# EAGLE board PCB (EAGLE 9.7.0)
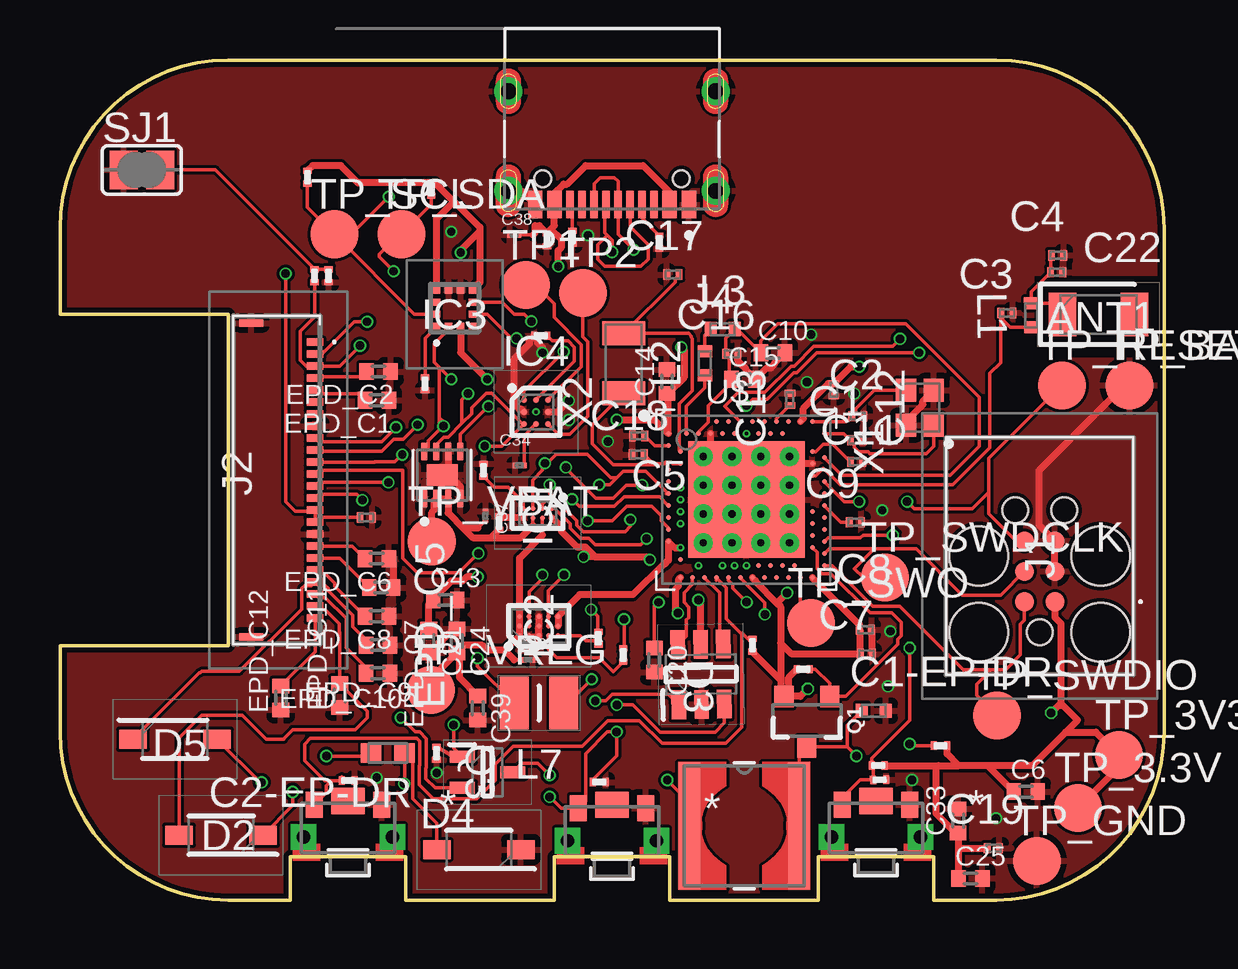
[diagram p0: board, top side]
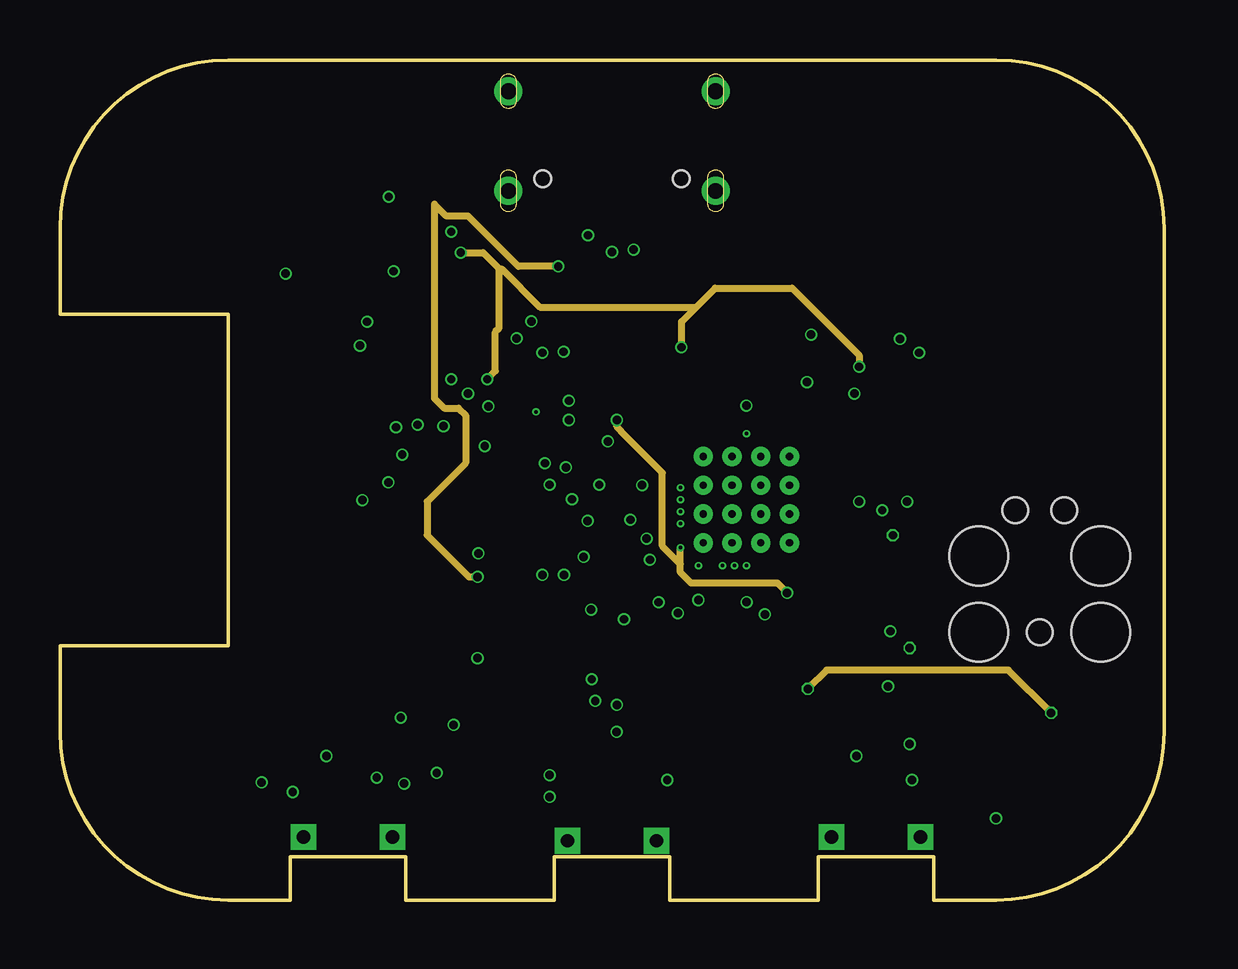
[diagram p1: board, inner layer Route15]
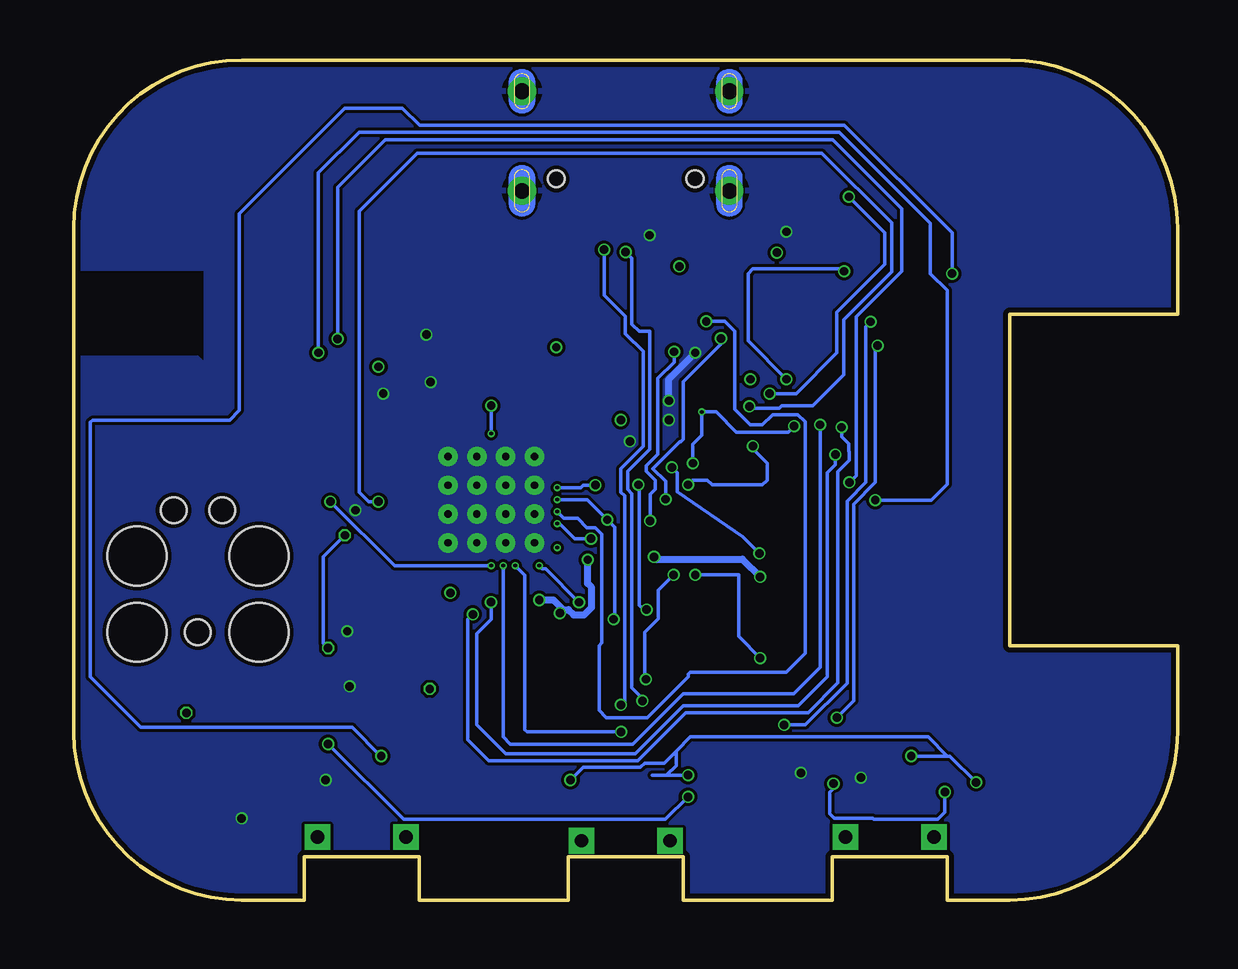
[diagram p2: board, bottom side, seen from below]

Size 46 x 35 mm. Coordinates in mm from the lower left corner, seen from the top.
Outline: 46,7 46,28 arc90 39,35 7,35 arc90 0,28 0,24.4 7,24.4 7,10.6 0,10.6 0,7 arc90 7,0 9.6,0 9.6,1.8 14.4,1.8 14.4,0 20.6,0 20.6,1.8 25.4,1.8 25.4,0 31.6,0 31.6,1.8 36.4,1.8 36.4,0 39,0 arc90 46,7
Copper layers (1+2*15+16): Top 0.035mm / dielectric 1.6mm / Route2 0.035mm / dielectric 0.15mm / Route15 0.035mm / dielectric 0.2mm / Bottom 0.035mm
Design rules "jlcpcb-2layers.dru *": minimum track width 5mil, minimum drill 0.3mm, track to track 5mil, track to pad 5mil, pad to pad 5mil, via to via 5mil, smd to smd 5mil, copper to edge 0.2mm, drill to drill 6mil, minimum pad ring 10mil, minimum via ring 3mil, stop-mask expansion 4mil, vias tented up to drill 0mil, thermal gap 10mil

## Footprints (pad centres in the part's own frame; a part is rotated, then mirrored left to right if it is on the bottom)
2450AT18B100E_ANTC3216X140N = smd 1.15 x 1.8: 1 -1.5,0; 2 1.5,0
NORDIC_NRF_3_RESC0201_L = smd 0.28 x 0.43: 1 -0.255,0; 2 0.255,0
NORDIC_NRF_3_RESC0402_L = smd 0.5 x 0.6: 1 -0.5,0; 2 0.5,0
NORDIC_NRF_3_RESC0603_L = smd 0.85 x 0.8: 1 -0.7,0; 2 0.7,0
PERFECT_0402_0402 = smd 0.6 x 0.7: 1 -0.5,0; 2 0.5,0
GRM011R60J152KE01L_2_CAPC0201X13N = smd 0.22 x 0.23: 1 -0.185,0; 2 0.185,0
GRM011R60J152KE01L_1_0201 = smd 0.35 x 0.25: 1 0,0.275; 2 0,-0.275
ESP32_C6_LIBRARY_5_SOD3716X135N = smd 1.15 x 0.8: 1 -1.75,0; 2 1.75,0
ESP32_C6_LIBRARY_3_SOT95P280X145-6N = smd 1.2 x 0.6: 1 -1.25,0.95; 2 -1.25,0; 3 -1.25,-0.95; 4 1.25,-0.95; 5 1.25,0; 6 1.25,0.95
BQ25180YBGR_BGA8C40P2X4_100X155X50 = smd 0.2 x 0.2: A1 -0.2,0.6; A2 0.2,0.6; B1 -0.2,0.2; B2 0.2,0.2; C1 -0.2,-0.2; C2 0.2,-0.2; D1 -0.2,-0.6; D2 0.2,-0.6
RT6160AWSC_BGA15C40P3X5_140X230X60 = smd 0.216 x 0.216: A1 -0.4,0.8; A2 0,0.8; A3 0.4,0.8; B1 -0.4,0.4; B2 0,0.4; B3 0.4,0.4; C1 -0.4,0; C2 0,0; C3 0.4,0; D1 -0.4,-0.4; D2 0,-0.4; D3 0.4,-0.4; E1 -0.4,-0.8; E2 0,-0.8; E3 0.4,-0.8
BMA423_BMA423 = smd 0.3 x 0.35: 1 -0.75,-0.775; 2 -0.25,-0.775; 3 0.25,-0.775; 4 0.75,-0.775; 7 0.75,0.775; 8 0.25,0.775; 9 -0.25,0.775; 10 -0.75,0.775 | smd 0.35 x 0.3: 5 0.775,-0.25; 6 0.775,0.25; 11 -0.775,0.25; 12 -0.775,-0.25
DRV2605YZFR_BGA9C50P3X3_144X144X62 = smd 0.25 x 0.25: A1 -0.5,0.5; A2 0,0.5; A3 0.5,0.5; B1 -0.5,0; B2 0,0; B3 0.5,0; C1 -0.5,-0.5; C2 0,-0.5; C3 0.5,-0.5
TC2030-IDC_TC2030IDC = smd 0.783 x 0.783: 1 -0.953,-0.635; 2 -0.953,0.635; 3 0.317,-0.635; 4 0.317,0.635; 5 1.588,-0.635; 6 1.588,0.635 | hole 2.451: -2.223,-2.54; -2.223,2.54; 0.952,-2.54; 0.952,2.54 | hole 1.067: -2.223,0; 2.857,-1.016; 2.857,1.016
503480-2400_5034802400 = smd 0.3 x 0.7: 1 -5.75,1.525; 2 -5.25,1.525; 3 -4.75,1.525; 4 -4.25,1.525; 5 -3.75,1.525; 6 -3.25,1.525; 7 -2.75,1.525; 8 -2.25,1.525; 9 -1.75,1.525; 10 -1.25,1.525; 11 -0.75,1.525; 12 -0.25,1.525; 13 0.25,1.525; 14 0.75,1.525; 15 1.25,1.525; 16 1.75,1.525; 17 2.25,1.525; 18 2.75,1.525; 19 3.25,1.525; 20 3.75,1.525; 21 4.25,1.525; 22 4.75,1.525; 23 5.25,1.525; 24 5.75,1.525 | smd 0.3 x 1: MP1 -6.54,-1.125; MP2 6.54,-1.125
KH-TYPE-C-16P_KINGHELM_KH-TYPE-C-16P = smd 0.6 x 1.15: A1_B12 -3.2,4.725; A4_B9 -2.4,4.725; A9_B4 2.4,4.725; A12_B1 3.2,4.725 | smd 0.3 x 1.15: A5 -1.25,4.725; A6 -0.25,4.725; A7 0.25,4.725; A8 1.25,4.725; B5 1.75,4.725; B6 0.75,4.725; B7 -0.75,4.725; B8 -1.75,4.725 | drill 0.65 pad 1.05: SH1 -4.32,0; SH2 4.32,0; SH3 -4.32,4.15; SH4 4.32,4.15 | hole 0.7: -2.89,3.65; 2.89,3.65
NORDIC_NRF_2_RESC0402_L = smd 0.5 x 0.6: 1 -0.5,0; 2 0.5,0
ESP32_C6_LIBRARY_2_IND_4828-WE-TPC_WRE = smd 0.9 x 5.3: 1 -2.286,0; 2 2.286,0
MLP2016SR47MT0S1_INDC2016X100N = smd 1.2 x 2.2: 1 -1.028,0; 2 1.028,0
ESP32_C6_LIBRARY_4_ESP32_C6_LIBRARY_4_ESP32_C6_LIBRARY_4_ESP32_C6_LIBRARY_4_ESP32_WROVER_SPARKFUN-DISCRETESEMI_SOT23-3 = smd 0.8 x 0.9: 1 -0.95,-1; 2 0.95,-1; 3 0,1.1
ESP32_C6_LIBRARY_6_SOT65P210X110-3N = smd 1.05 x 0.5: 1 -1.05,0.65; 2 -1.05,-0.65; 3 1.05,0
CPF0201D7K68C1_0201 = smd 0.35 x 0.25: 1 0,0.275; 2 0,-0.275
ERA-1AEB3401C_0201 = smd 0.35 x 0.25: 1 0,0.275; 2 0,-0.275
ESP32_C6_LIBRARY_7_JUMPER_SJ = smd 1.168 x 1.6: 1 -0.762,0; 2 0.762,0
2025-10-22_07-23-44_LIBRARY_SW_EVP-AKE31A_PAN = smd 0.711 x 1.092: 1 -1.4,-0.972; 2 1.4,-0.972 | drill 0.559 pad 0.914 square: 3 -1.848,0.381; 4 1.848,0.381 | smd 1.397 x 1.092: 5 0,-1.124
HECTOR_WATCH_1_TP20R = smd 2 x 2: TP 0,0
ESP32_C6_LIBRARY_SON50P200X200X80-9N = smd 0.76 x 0.27: 1 -0.985,0.75; 2 -0.985,0.25; 3 -0.985,-0.25; 4 -0.985,-0.75; 5 0.985,-0.75; 6 0.985,-0.25; 7 0.985,0.25; 8 0.985,0.75 | smd 0.9 x 1.3: 9 0,0
NORDIC_NRF_4_AQFN50P700X700X85_HS-74N = smd 4.85 x 4.85: P$74 0,0 | drill 0.3 pad 0.6: P$75 -1.8,1.8; P$76 -0.6,1.8; P$77 0.6,1.8; P$78 1.8,1.8; P$79 -1.8,0.6; P$80 -0.6,0.6; P$81 0.6,0.6; P$82 1.8,0.6; P$83 -1.8,-0.6; P$84 -0.6,-0.6; P$85 0.6,-0.6; P$86 1.8,-0.6; P$87 -1.8,-1.8; P$88 -0.6,-1.8; P$89 0.6,-1.8; P$90 1.8,-1.8 | smd 0.2 x 0.2: P$A8 -1.25,3.25; P$A10 -0.75,3.25; P$A12 -0.25,3.25; P$A14 0.25,3.25; P$A16 0.75,3.25; P$A18 1.25,3.25; P$A20 1.75,3.25; P$A22 2.25,3.25; P$A23 2.75,3.25; P$AA24 3.25,-2.25; P$AB2 -2.75,-2.5; P$AC5 -2,-2.75; P$AC9 -1,-2.75; P$AC11 -0.5,-2.75; P$AC13 0,-2.75; P$AC15 0.5,-2.75; P$AC17 1,-2.75; P$AC19 1.5,-2.75; P$AC21 2,-2.75; P$AC24 3.25,-2.75; P$AD2 -2.75,-3.25; P$AD4 -2.25,-3.25; P$AD6 -1.75,-3.25; P$AD8 -1.25,-3.25; P$AD10 -0.75,-3.25; P$AD12 -0.25,-3.25; P$AD14 0.25,-3.25; P$AD16 0.75,-3.25; P$AD18 1.25,-3.25; P$AD20 1.75,-3.25; P$AD22 2.25,-3.25; P$AD23 2.75,-3.25; P$B1 -3.25,2.75; P$B3 -2.5,2.75; P$B5 -2,2.75; P$B7 -1.5,2.75; P$B9 -1,2.75; P$B11 -0.5,2.75; P$B13 0,2.75; P$B15 0.5,2.75; P$B17 1,2.75; P$B19 1.5,2.75; P$B24 3.25,2.75; P$C1 -3.25,2.25; P$D2 -2.75,2; P$D23 2.75,2; P$E24 3.25,1.75; P$F2 -2.75,1.5; P$F23 2.75,1.5; P$G1 -3.25,1.25; P$H2 -2.75,1; P$H23 2.75,1; P$J1 -3.25,0.75; P$J24 3.25,0.75; P$K2 -2.75,0.5; P$L1 -3.25,0.25; P$L24 3.25,0.25; P$M2 -2.75,0; P$N1 -3.25,-0.25; P$N24 3.25,-0.25; P$P2 -2.75,-0.5; P$P23 2.75,-0.5; P$R1 -3.25,-0.75; P$R24 3.25,-0.75; P$T2 -2.75,-1; P$T23 2.75,-1; P$U1 -3.25,-1.25; P$U24 3.25,-1.25; P$V23 2.75,-1.5; P$W1 -3.25,-1.75; P$W24 3.25,-1.75; P$Y2 -2.75,-2; P$Y23 2.75,-2
NORDIC_NRF_BT-XTAL_2016_N = smd 0.95 x 0.85: 1 -0.725,-0.575; 2 0.725,-0.575; 3 0.725,0.575; 4 -0.725,0.575
NORDIC_NRF_1_XTAL_3215_N = smd 1 x 1.8: 1 -1.25,0; 2 1.25,0

## Placement (x,y rotation side)
ANT1  2450AT18B100E_2450AT18B100E  [2450AT18B100E_ANTC3216X140N]  43.27,24.4 0 top
C1  12pF  [NORDIC_NRF_3_RESC0201_L]  33.19,19.16 0 top
C1-EP-DR  10µF  [NORDIC_NRF_3_RESC0402_L]  33.91,7.89 0 top
C2  12pF  [NORDIC_NRF_3_RESC0201_L]  33.24,20.16 0 top
C2-EP-DR  4.7µF/25V  [NORDIC_NRF_3_RESC0603_L]  13.66,6.13 180 top
C3  1pF  [NORDIC_NRF_3_RESC0201_L]  39.45,24.46 0 top
C4  1pF  [NORDIC_NRF_3_RESC0201_L]  41.57,26.86 0 top
C5  100nF  [NORDIC_NRF_3_RESC0201_L]  24.11,19.34 180 top
C6  4.7µF  [PERFECT_0402_0402]  40.24,4.52 0 top
C7  100nF  [NORDIC_NRF_3_RESC0201_L]  33.6,10.25 359.7 top
C8  100nF  [NORDIC_NRF_3_RESC0201_L]  33.56,11.26 0 top
C9  820pF N.C  [NORDIC_NRF_3_RESC0201_L]  33.14,15.74 0 top
C10  N.C  [PERFECT_0402_0402]  29.7,22.8 0 top
C11  100pF  [NORDIC_NRF_3_RESC0201_L]  33.19,18.26 0 top
C12  100nF  [NORDIC_NRF_3_RESC0201_L]  32.24,21.26 270 top
C13  N.C  [NORDIC_NRF_3_RESC0201_L]  30.41,20.86 90 top
C14  4.7µF  [PERFECT_0402_0402]  25.29,21.6 90 top
C15  1.0µF  [PERFECT_0402_0402]  28.48,21.7 0 top
C16  47nF  [NORDIC_NRF_3_RESC0201_L]  27.99,22.76 0 top
C17  12pF  [NORDIC_NRF_3_RESC0201_L]  25.54,26.06 0 top
C18  12pF  [NORDIC_NRF_3_RESC0201_L]  24.09,18.56 0 top
C19  100nF  [NORDIC_NRF_3_RESC0201_L]  38.89,2.16 0 top
C20  4.7µF  [PERFECT_0402_0402]  24.77,10 270 top
C21  4.7µF  [PERFECT_0402_0402]  15.36,10.8 270 top
C22  N.C  [NORDIC_NRF_3_RESC0201_L]  41.53,26.16 0 top
C23  1uF  [GRM011R60J152KE01L_2_CAPC0201X13N]  19.51,10.01 0 top
C24  10µF  [PERFECT_0402_0402]  16.54,10.8 270 top
C25  22µF  [PERFECT_0402_0402]  37.93,0.9 0 top
C27  0.1µF  [GRM011R60J152KE01L_1_0201]  18.29,15.71 0 top
C29  1µF  [GRM011R60J152KE01L_1_0201]  34.15,5.01 271.7 top
C30  1µF  [GRM011R60J152KE01L_1_0201]  12.01,4.98 270.5 top
C31  1µF  [GRM011R60J152KE01L_1_0201]  22.47,4.91 270 top
C32  1µF  [GRM011R60J152KE01L_1_0201]  20.03,23.51 90 top
C33  22µF  [PERFECT_0402_0402]  37.42,3.3 90 top
C34  0.1µF  [GRM011R60J152KE01L_2_CAPC0201X13N]  19.15,18.11 0 top
C37  1uF  [GRM011R60J152KE01L_2_CAPC0201X13N]  17.73,16.01 270 top
C38  1uF  [GRM011R60J152KE01L_2_CAPC0201X13N]  18.93,27.71 0 top
C39  10uF  [PERFECT_0402_0402]  17.41,8 270 top
C42  0.1µF  [GRM011R60J152KE01L_1_0201]  20.29,27.51 0 top
C43  4.7µF  [PERFECT_0402_0402]  16.05,12.5 0 top
D2  MBR0530  [ESP32_C6_LIBRARY_5_SOD3716X135N]  6.71,2.7 180 top
D3  USBLC6-2SC6Y  [ESP32_C6_LIBRARY_3_SOT95P280X145-6N]  26.71,9.4 90.9 top
D4  MBR0530  [ESP32_C6_LIBRARY_5_SOD3716X135N]  17.45,2.1 180 top
D5  MBR0530  [ESP32_C6_LIBRARY_5_SOD3716X135N]  4.79,6.7 0 top
EPD_C1  1uF/50V  [PERFECT_0402_0402]  13.2,20.82 180 top
EPD_C2  1uF/50V  [PERFECT_0402_0402]  13.28,22.02 180 top
EPD_C5  0.1uF/50V  [NORDIC_NRF_3_RESC0201_L]  12.76,15.94 180 top
EPD_C6  1uF/50V  [PERFECT_0402_0402]  13.2,14.22 180 top
EPD_C7  1uF/50V  [PERFECT_0402_0402]  13.39,13.02 180 top
EPD_C8  1uF/50V  [PERFECT_0402_0402]  13.2,11.82 180 top
EPD_C9  1uF/50V  [PERFECT_0402_0402]  13.25,10.62 180 top
EPD_C10  1uF/50V  [PERFECT_0402_0402]  13.25,9.45 180 top
EPD_C11  1uF/50V  [PERFECT_0402_0402]  11.65,8.52 90 top
EPD_C12  1uF/50V  [PERFECT_0402_0402]  9.2,8.42 90 top
IC1  BQ25180YBGR_BQ25180YBGR  [BQ25180YBGR_BGA8C40P2X4_100X155X50]  19.9,16.12 270 top
IC2  RT6160AWSC_RT6160AWSC  [RT6160AWSC_BGA15C40P3X5_140X230X60]  19.95,11.42 90 top
IC3  BMA423_BMA423  [BMA423_BMA423]  16.44,24.66 0 top
IC4  DRV2605YZFR_DRV2605YZFR  [DRV2605YZFR_BGA9C50P3X3_144X144X62]  19.83,20.34 0 top
J1  TC2030-IDC_TC2030-IDC  [TC2030-IDC_TC2030IDC]  40.82,13.38 90 top
J2  503480-2400_503480-2400  [503480-2400_5034802400]  9.1,17.5 270 top
J4  KH-TYPE-C-16P  [KH-TYPE-C-16P_KINGHELM_KH-TYPE-C-16P]  23,33.7 180 top
L1  3.9nH  [NORDIC_NRF_2_RESC0402_L]  40.47,24.36 90.7 top
L2  10µF  [NORDIC_NRF_2_RESC0402_L]  26.87,22.36 90 top
L3  15nH  [NORDIC_NRF_2_RESC0402_L]  27.62,23.78 0 top
L5  68µH  [ESP32_C6_LIBRARY_2_IND_4828-WE-TPC_WRE]  28.51,3.09 0 top
L7  MLP2016SR47MT0S1_FTC252012SR47MBCA  [MLP2016SR47MT0S1_INDC2016X100N]  19.96,8.21 0 top
Q1  20V/4.2A/52mΩ/1.4W  [ESP32_C6_LIBRARY_4_ESP32_C6_LIBRARY_4_ESP32_C6_LIBRARY_4_ESP32_C6_LIBRARY_4_ESP32_WROVER_SPARKFUN-DISCRETESEMI_SOT23-3]  31.12,7.48 180 top
Q3  SI1308EDL-T1-GE3  [ESP32_C6_LIBRARY_6_SOT65P210X110-3N]  17.81,5.32 0.2 top
R1  10K  [CPF0201D7K68C1_0201]  28.85,10.61 0 top
R1_EP_DR  0.47  [CPF0201D7K68C1_0201]  10.61,26.01 0 top
R1_USB  5K1  [CPF0201D7K68C1_0201]  24.97,27.41 180 top
R2  0  [CPF0201D7K68C1_0201]  22.43,10.91 0 top
R2_EP_DR  10K  [CPF0201D7K68C1_0201]  15.69,6.11 180 top
R2_USB  5K1  [CPF0201D7K68C1_0201]  21.35,27.61 0 top
R3  0  [CPF0201D7K68C1_0201]  15.21,21.51 0 top
R4  0  [CPF0201D7K68C1_0201]  23.47,10.21 0 top
R5  10K  [CPF0201D7K68C1_0201]  36.69,6.43 90 top
R6  10K  [CPF0201D7K68C1_0201]  34.09,5.6 90 top
R9  10K  [CPF0201D7K68C1_0201]  17.65,17.91 0 top
R17  3K3  [ERA-1AEB3401C_0201]  10.31,30.11 0 top
R18  3K3  [ERA-1AEB3401C_0201]  15.47,29.61 0 top
R_PWR_EPD  10K  [CPF0201D7K68C1_0201]  30.97,9.61 270 top
R_TYPE_SEL  2.2  [CPF0201D7K68C1_0201]  11.19,26.01 180 top
SJ1  [ESP32_C6_LIBRARY_7_JUMPER_SJ]  3.41,30.42 0 top
SW_DN  2025-10-22_07-23-44_LIBRARY_EVP-AKE31ASW_EVP-AKE31A_PAN  [2025-10-22_07-23-44_LIBRARY_SW_EVP-AKE31A_PAN]  34,3 180 top
SW_ENT  2025-10-22_07-23-44_LIBRARY_EVP-AKE31ASW_EVP-AKE31A_PAN  [2025-10-22_07-23-44_LIBRARY_SW_EVP-AKE31A_PAN]  23,2.85 180 top
SW_UP  2025-10-22_07-23-44_LIBRARY_EVP-AKE31ASW_EVP-AKE31A_PAN  [2025-10-22_07-23-44_LIBRARY_SW_EVP-AKE31A_PAN]  12,3 180 top
TP1  HECTOR_WATCH_1_TPTP20R  [HECTOR_WATCH_1_TP20R]  19.42,25.62 0 top
TP2  HECTOR_WATCH_1_TPTP20R  [HECTOR_WATCH_1_TP20R]  21.79,25.3 0 top
TP_3.3V  HECTOR_WATCH_1_TPTP20R  [HECTOR_WATCH_1_TP20R]  42.42,3.84 0 top
TP_3V3  HECTOR_WATCH_1_TPTP20R  [HECTOR_WATCH_1_TP20R]  44.12,6.04 0 top
TP_BAT_GND  HECTOR_WATCH_1_TPTP20R  [HECTOR_WATCH_1_TP20R]  44.57,21.44 0 top
TP_GND  HECTOR_WATCH_1_TPTP20R  [HECTOR_WATCH_1_TP20R]  40.7,1.63 0 top
TP_RESET  HECTOR_WATCH_1_TPTP20R  [HECTOR_WATCH_1_TP20R]  41.74,21.44 0 top
TP_SCL  HECTOR_WATCH_1_TPTP20R  [HECTOR_WATCH_1_TP20R]  11.44,27.74 0 top
TP_SDA  HECTOR_WATCH_1_TPTP20R  [HECTOR_WATCH_1_TP20R]  14.23,27.74 0 top
TP_SWDCLK  HECTOR_WATCH_1_TPTP20R  [HECTOR_WATCH_1_TP20R]  34.37,13.44 0 top
TP_SWDIO  HECTOR_WATCH_1_TPTP20R  [HECTOR_WATCH_1_TP20R]  39.04,7.69 0 top
TP_SWO  HECTOR_WATCH_1_TPTP20R  [HECTOR_WATCH_1_TP20R]  31.3,11.54 0 top
TP_VBAT  HECTOR_WATCH_1_TPTP20R  [HECTOR_WATCH_1_TP20R]  15.49,14.94 0 top
TP_VREG  HECTOR_WATCH_1_TPTP20R  [HECTOR_WATCH_1_TP20R]  15.45,8.74 0 top
U3  MAX17048G+T10  [ESP32_C6_LIBRARY_SON50P200X200X80-9N]  15.93,17.71 90 top
U$1  NORDIC_NRF_4_NRF52840_QF  [NORDIC_NRF_4_AQFN50P700X700X85_HS-74N]  28.6,16.68 0 top
X1  32MHz  [NORDIC_NRF_BT-XTAL_2016_N]  35.83,20.51 90 top
X2  32.768kHz  [NORDIC_NRF_1_XTAL_3215_N]  23.49,22.36 90 top

## Library data of the parts
ANT1 = InkTime_v5; ARROW_PART_NUMBER: 2450AT18B100E; ARROW_PRICE-STOCK: https://www.arrow.com/en/products/2450at18b100e/johanson-dielectrics?utm_currency=USD&region=nac; DESCRIPTION: Antennas 2.45GHz ANTENNA; HEIGHT: 1.4mm; MANUFACTURER_NAME: JOHANSON TECHNOLOGY; MANUFACTURER_PART_NUMBER: 2450AT18B100E; MOUSER_PART_NUMBER: 609-2450AT18B100E; MOUSER_PRICE-STOCK: https://www.mouser.co.uk/ProductDetail/Johanson-Technology/2450AT18B100E?qs=yCnrNFeXz%252Bh5MFsFIXGZGA%3D%3D
C1 C1-EP-DR C2 C2-EP-DR C3-C22 C24 C25 C27 C29-C33 C39 C42 C43 EPD_C1 EPD_C2 EPD_C5-EPD_C12 L1-L3 R1 R1_EP_DR R1_USB R2 R2_EP_DR R2_USB R3-R6 R9 R17 R18 R_PWR_EPD R_TYPE_SEL SJ1 TP1 TP2 TP_3.3V TP_3V3 TP_BAT_GND TP_GND TP_RESET TP_SCL TP_SDA TP_SWDCLK TP_SWDIO TP_SWO TP_VBAT TP_VREG U$1 X1 X2 = InkTime_v5
C23 C34 C37 C38 = InkTime_v5; AVAILABILITY: In Stock; CHECK_PRICES: https://www.snapeda.com/parts/GRM011R60J152KE01L/Murata/view-part/?ref=eda; DESCRIPTION: SMD Capacitor X5R(EIA) with Capacitance: 1500pF Tol. 10%. Rated Voltage: 6.3Vdc; MF: Murata; MP: GRM011R60J152KE01L; PACKAGE: 0201 Murata; PRICE: None; SNAPEDA_LINK: https://www.snapeda.com/parts/GRM011R60J152KE01L/Murata/view-part/?ref=snap
D2 D4 D5 = InkTime_v5; AVAILABILITY: In Stock; CHECK_PRICES: https://www.snapeda.com/parts/MBR0530/Onsemi/view-part/?ref=eda; DESCRIPTION: Diode Schottky 30 V 500mA Surface Mount SOD-123; MF: ON Semiconductor; MP: MBR0530; PACKAGE: SOD-123-2 ON Semiconductor; PRICE: None; PURCHASE-URL: https://www.snapeda.com/api/url_track_click_mouser/?unipart_id=179458&manufacturer=ON Semiconductor&part_name=MBR0530&search_term=None; SNAPEDA_LINK: https://www.snapeda.com/parts/MBR0530/Onsemi/view-part/?ref=snap
D3 = InkTime_v5; AVAILABILITY: In Stock; CHECK_PRICES: https://www.snapeda.com/parts/USBLC6-2SC6Y/STMicroelectronics/view-part/?ref=eda; DESCRIPTION: 17V Clamp 5A (8/20µs) Ipp Tvs Diode Surface Mount SOT-23-6; MF: STMicroelectronics; MP: USBLC6-2SC6Y; PACKAGE: SOT-23-6 STMicroelectronics; PRICE: None; SNAPEDA_LINK: https://www.snapeda.com/parts/USBLC6-2SC6Y/STMicroelectronics/view-part/?ref=snap
IC1 = InkTime_v5; ARROW_PART_NUMBER: BQ25180YBGR; ARROW_PRICE-STOCK: https://www.arrow.com/en/products/bq25180ybgr/texas-instruments?utm_currency=USD&region=nac; DESCRIPTION: Charger IC Lithium Ion/Polymer, Lithium Iron Phosphate 8-DSBGA (1.6x1.1); HEIGHT: 0.5mm; MANUFACTURER_NAME: Texas Instruments; MANUFACTURER_PART_NUMBER: BQ25180YBGR; MOUSER_PART_NUMBER: 595-BQ25180YBGR; MOUSER_PRICE-STOCK: https://www.mouser.co.uk/ProductDetail/Texas-Instruments/BQ25180YBGR?qs=doiCPypUmgEWjAK%252BJAX6Tw%3D%3D
IC2 = InkTime_v5; DESCRIPTION: Buck-Boost Regulator Positive Output Step-Up/Step-Down I2C DC-DC Controller IC 15-WL-CSP (BSC) (1.4x2.3); HEIGHT: 0.6mm; MANUFACTURER_NAME: RICHTEK; MANUFACTURER_PART_NUMBER: RT6160AWSC; MOUSER_PART_NUMBER: 835-RT6160AWSC; MOUSER_PRICE-STOCK: https://www.mouser.co.uk/ProductDetail/Richtek/RT6160AWSC?qs=amGC7iS6iy%2FLd9PSoixZXQ%3D%3D
IC3 = InkTime_v5; ARROW_PART_NUMBER: BMA423; ARROW_PRICE-STOCK: https://www.arrow.com/en/products/bma423/bosch; DESCRIPTION: Accelerometers Triaxial low-g 12bit Acceleration Sensor; HEIGHT: 1mm; MANUFACTURER_NAME: BOSCH; MANUFACTURER_PART_NUMBER: BMA423; MOUSER_PART_NUMBER: 262-BMA423; MOUSER_PRICE-STOCK: https://www.mouser.co.uk/ProductDetail/Bosch-Sensortec/BMA423?qs=HXFqYaX1Q2xC%252BSgeGoX3mg%3D%3D
IC4 = InkTime_v5; ARROW_PART_NUMBER: DRV2605YZFR; ARROW_PRICE-STOCK: https://www.arrow.com/en/products/drv2605yzfr/texas-instruments?region=nac; DESCRIPTION: Haptic Driver for ERM/LRA with Built-In Library and Smart Loop Architecture; HEIGHT: 0.625mm; MANUFACTURER_NAME: Texas Instruments; MANUFACTURER_PART_NUMBER: DRV2605YZFR
J1 = InkTime_v5; DESCRIPTION: CABLE ADAPTER 6 POS; HEIGHT: 19mm; MANUFACTURER_NAME: Tag Connect; MANUFACTURER_PART_NUMBER: TC2030-IDC
J2 = InkTime_v5; DESCRIPTION: FFC & FPC Connectors 0.5mm FPC RA SMT Dual Contact 24Ckt; HEIGHT: 1.87mm; MANUFACTURER_NAME: Molex; MANUFACTURER_PART_NUMBER: 503480-2400; MOUSER_PART_NUMBER: 538-503480-2400; MOUSER_PRICE-STOCK: https://www.mouser.co.uk/ProductDetail/Molex/503480-2400?qs=OAhjpuo3Vu7efIoxFh9AOw%3D%3D
J4 = InkTime_v5; AVAILABILITY: Not in stock; CHECK_PRICES: https://www.snapeda.com/parts/KH-TYPE-C-16P/Kinghelm/view-part/?ref=eda; MF: kinghelm; MP: KH-TYPE-C-16P; PACKAGE: None; PRICE: None; SNAPEDA_LINK: https://www.snapeda.com/parts/KH-TYPE-C-16P/Kinghelm/view-part/?ref=snap
L5 = InkTime_v5; COPYRIGHT: Copyright (C) 2024 Ultra Librarian. All rights reserved.; MANUFACTURER_PART_NUMBER: 744043680; MFR_NAME: Wurth Electronics
L7 = InkTime_v5; DESCRIPTION: SMD / SMT Inductors (Coils), L=0.47?H, L x W x T :; HEIGHT: 1mm; JLCPCB: https://jlcpcb.com/partdetail/6763488-FTC252012SR47MBCA/C5832368; MANUFACTURER_NAME: TDK; MANUFACTURER_PART_NUMBER: FTC252012SR47MBCA
Q1 = InkTime_v5; PROD_ID: TRAN-14388
Q3 = InkTime_v5; AVAILABILITY: In Stock; CHECK_PRICES: https://www.snapeda.com/parts/SI1308EDL-T1-GE3/Vishay+Siliconix/view-part/?ref=eda; DESCRIPTION: Si1308EDL-T1-GE3 N-channel MOSFET Transistor, 1.5 A, 30 V, 3-Pin SC-70 | Siliconix / Vishay SI1308EDL-T1-GE3; MF: Vishay Siliconix; MP: SI1308EDL-T1-GE3; PACKAGE: SOT-323 Vishay Semiconductor; PRICE: None; PURCHASE-URL: https://www.snapeda.com/api/url_track_click_mouser/?unipart_id=274603&manufacturer=Vishay Siliconix&part_name=SI1308EDL-T1-GE3&search_term=None; SNAPEDA_LINK: https://www.snapeda.com/parts/SI1308EDL-T1-GE3/Vishay+Siliconix/view-part/?ref=snap
SW_DN SW_ENT SW_UP = InkTime_v5; COPYRIGHT: Copyright (C) 2025 Ultra Librarian. All rights reserved.; DIGI-KEY_PART_NUMBER_1: P123437TR-ND; DIGI-KEY_PART_NUMBER_2: P123437CT-ND; DIGI-KEY_PART_NUMBER_3: P123437DKR-ND; MANUFACTURER_NAME: Panasonic; MANUFACTURER_PART_NUMBER: EVP-AKE31A
U3 = InkTime_v5; AVAILABILITY: In Stock; CHECK_PRICES: https://www.snapeda.com/parts/MAX17048G+T10/Analog+Devices/view-part/?ref=eda; DESCRIPTION: 3µA 1-Cell/2-Cell Fuel Gauge with ModelGauge; MF: Analog Devices; MP: MAX17048G+T10; PACKAGE: TDFN-8 Maxim; PRICE: None; PURCHASE-URL: https://www.snapeda.com/api/url_track_click_mouser/?unipart_id=329239&manufacturer=Analog Devices&part_name=MAX17048G+T10&search_term=None; SNAPEDA_LINK: https://www.snapeda.com/parts/MAX17048G+T10/Analog+Devices/view-part/?ref=snap

## Nets
3V3: C6.1 C7.1 C8.1 C12.1 C14.1 C19.1 C25.1 C33.1 IC2.E2 IC2.E3 IC3.3 IC3.7 IC3.10 J1.1 Q1.2 R1.2 R5.2 R6.2 R17.1 R18.1 R_PWR_EPD.2 TP_3.3V.TP TP_3V3.TP U$1.P$A22 U$1.P$AD14 U$1.P$AD23 U$1.P$B1 U$1.P$W1 U$1.P$Y2
3V3/1.7D: C34.2 IC4.C2
ALERT: U3.5 U$1.P$J24
D+: D3.4 U$1.P$AD6
D-: D3.6 U$1.P$AD4
DN: D3.1 J4.A7 J4.B7
DP: D3.3 J4.A6 J4.B6
EPD_3V3: C1-EP-DR.1 EPD_C5.2 J2.15 J2.16 L5.2 Q1.3
EPD_BUSY: J2.9 U$1.P$AD12
EPD_CS: J2.12 U$1.P$K2
EPD_DC: J2.11 U$1.P$AD10
EPD_RST: J2.10 U$1.P$AC11
GDR: J2.2 Q3.1 R2_EP_DR.2
GND: C1-EP-DR.2 C1.2 C2.2 C3.2 C4.2 C5.2 C6.2 C7.2 C8.2 C9.2 C10.2 C11.2 C12.2 C13.2 C14.2 C15.2 C16.2 C17.1 C18.1 C19.2 C20.2 C21.2 C22.2 C23.2 C24.1 C25.2 C27.1 C29.1 C30.1 C31.1 C32.1 C33.2 C34.1 C37.1 C38.1 C39.2 C42.2 C43.2 D3.2 D4.1 EPD_C1.1 EPD_C2.1 EPD_C5.1 EPD_C6.1 EPD_C7.1 EPD_C8.1 EPD_C9.1 EPD_C10.1 EPD_C11.1 EPD_C12.1 IC1.D2 IC2.B1 IC2.C1 IC2.C2 IC2.C3 IC3.8 IC3.9 IC4.B1 IC4.B3 J1.3 J1.5 J2.8 J2.17 J2.MP1 J2.MP2 J4.A1_B12 J4.A12_B1 J4.SH1 J4.SH2 J4.SH3 J4.SH4 R1_USB.1 R2_EP_DR.1 R2_USB.2 R3.2 R9.1 R_TYPE_SEL.1 SJ1.1 SW_DN.1 SW_ENT.1 SW_UP.1 TP_BAT_GND.TP TP_GND.TP U3.1 U3.4 U3.6 U3.9 U$1.P$74 U$1.P$75 U$1.P$76 U$1.P$77 U$1.P$78 U$1.P$79 U$1.P$80 U$1.P$81 U$1.P$82 U$1.P$83 U$1.P$84 U$1.P$85 U$1.P$86 U$1.P$87 U$1.P$88 U$1.P$89 U$1.P$90 U$1.P$B7 U$1.P$F23 X1.2 X1.4
HAPTIC_EN: IC4.A1 U$1.P$U1
IMU_INT1: IC3.5 U$1.P$N1
IMU_INT2: IC3.6 U$1.P$P2
LX1: IC2.B2 IC2.B3 L7.1
LX2: IC2.D2 IC2.D3 L7.2
MOSI: J2.14 U$1.P$B13
N$1: L2.2 L3.1
N$2: L2.1 U$1.P$B3
N$3: IC1.D1 R9.2
N$4: IC3.1 R3.1
N$5: IC2.D1 R4.2
N$6: C10.1 C15.1 C16.1 L3.2 U$1.P$B5 U$1.P$E24
N$7: IC2.E1 R2.2
N$8: C13.1 U$1.P$A18
N$9: C11.1 U$1.P$D23
N$10: C2.1 U$1.P$A23 X1.3
N$11: C1.1 U$1.P$B24 X1.1
N$12: C3.1 L1.1 U$1.P$H23
N$14: ANT1.1 C4.1 C22.1 L1.2
N$16: C9.1 U$1.P$N24
N$17: C20.1 U$1.P$AC5
N$18: C5.1 U$1.P$C1
N$22: C17.2 U$1.P$D2 X2.2
N$24: C18.2 U$1.P$F2 X2.1
N$35: EPD_C1.2 J2.5
N$37: C2-EP-DR.2 D5.2 L5.1 Q3.3
N$38: EPD_C2.2 J2.4
N$39: C32.2 IC4.A2
N$40: C2-EP-DR.1 D2.1 D4.2
N$43: J4.B5 R2_USB.1
N$44: J4.A5 R1_USB.2
N$46: R1_EP_DR.1 R_TYPE_SEL.2 SJ1.2
N$51: EPD_C6.2 J2.18
N$55: EPD_C7.2 J2.19
N$57: EPD_C8.2 J2.20
N$61: EPD_C10.2 J2.22
N$65: EPD_C12.2 J2.24
OUT+: IC4.A3 TP1.TP
OUT-: IC4.C3 TP2.TP
P0.04: U$1.P$J1
P0.09: U$1.P$L24
P0.13: C30.2 R1.1 SW_UP.2 U$1.P$AD8
P0.14: C31.2 R5.1 SW_ENT.2 U$1.P$AC9
P0.19: U$1.P$AC15
P0.20: U$1.P$AD16
P0.21: U$1.P$AC17
P0.22: U$1.P$AD18
P0.23: U$1.P$AC19
P0.24: U$1.P$AD20
P0.25: U$1.P$AC21
P0.26: U$1.P$G1
P0.27: U$1.P$H2
P0.28: U$1.P$B11
P0.29: U$1.P$A10
P0.30: U$1.P$B9
P0.31: U$1.P$A8
P1.01: Q1.1 R_PWR_EPD.1 U$1.P$Y23
P1.02: C29.2 R6.1 SW_DN.2 U$1.P$W24
P1.03: U$1.P$V23
P1.04: U$1.P$U24
P1.05: U$1.P$T23
P1.06: U$1.P$R24
P1.07: U$1.P$P23
P1.09: U$1.P$R1
P1.10: U$1.P$A20
P1.11: U$1.P$B19
P1.12: U$1.P$B17
P1.13: U$1.P$A16
P1.14: U$1.P$B15
P1.15: U$1.P$A14
PMIC_INT: IC1.A1 U$1.P$T2
PREVGH: D5.1 EPD_C9.2 J2.21
PREVGL: D2.2 EPD_C11.2 J2.23
RESE: J2.3 Q3.2 R1_EP_DR.2
RESET: J1.6 TP_RESET.TP U$1.P$AC13
SCK: J2.13 U$1.P$A12
SCL: IC1.B1 IC3.12 IC4.C1 R4.1 R17.2 TP_SCL.TP U3.7 U$1.P$M2
SDA: IC1.C1 IC3.2 IC4.B2 R2.1 R18.2 TP_SDA.TP U3.8 U$1.P$L1
SWDCLK: J1.4 TP_SWDCLK.TP U$1.P$AA24
SWDIO: J1.2 TP_SWDIO.TP U$1.P$AC24
SWO: TP_SWO.TP U$1.P$AD22
VBAT: C27.2 C37.2 IC1.C2 TP_VBAT.TP U3.2 U3.3
VBUS: C21.1 C38.2 C42.1 C43.1 D3.5 IC1.A2 J4.A4_B9 J4.A9_B4 U$1.P$AD2
VREG: C23.1 C24.2 C39.1 IC1.B2 IC2.A1 IC2.A2 IC2.A3 TP_VREG.TP

## Tracks (layer width: path | path; a pad name or v marks a point on that pad's centre or on a via)
3V3  (via drill 0.15, 0.35)
  Top 0.3: 30.02,10.7 30.02,9.17 | 30.02,9.17 30.02,8.63 Q1.2 | J1.1 41.45,11.77 41.7,11.52 41.7,8.2 | 41.7,8.2 41.7,8.1 41.8,8.1 42.4,7.5 41.9,7 | 41.7,8.2 v41.3,7.8 | R6.2 36.6,5.6 | 36.6,5.6 37.46,5.6 | 37.43,2.16 C25.1 | 37.43,2.16 C19.1 | Q1.2 30.37,8.68 30.37,9.29 R_PWR_EPD.2 | v31.16,8.8 30.84,8.48 Q1.2 | 41.9,7 43.16,7 TP_3V3.TP 44.12,5.54 TP_3.3V.TP | C6.1 38.66,5.6 | IC2.E2 IC2.E3 21.65,12.72 23.87,12.72 25.15,14 25.2,14 25.35,14.15 U$1.P$W1 25.6,14.68 U$1.P$Y2 | 30.02,10.7 30.46,10.26 33.34,10.26 C7.1 33.35,11.22 C8.1 33.3,11.47 U$1.P$AD23 | 30.02,9.17 R1.2 | 37.43,2.16 37.43,2.75 37.34,2.84 37.34,2.88 C33.1 37.3,2.8 36.5,3.6 36.5,5.5 36.6,5.6 | 38.66,5.6 40.5,5.6 41.9,7 | 38.66,5.6 37.46,5.6 | U$1.P$AD14 28.97,13.3 28.97,13.27 29.87,12.37 | U$1.P$A22 30.97,20.05 30.97,20.48 32,21.52 C12.1 32.95,22.22 v33.3,22.22 | 30.02,10.7 30.02,12.22 29.87,12.37 | 37.46,5.6 36.97,6.09 R5.2 | IC3.10 15.69,28.39 16.4,29.1 | 16.4,29.1 16.41,29.11 17.49,28.04 17.49,27.86 | 16.4,29.1 15.62,29.88 R18.1 12.41,29.88 11.7,30.6 10.53,30.6 R17.1 | IC3.3 16.69,22.81 v17.8,21.7 | v30.3,12.8 29.87,12.37 | 17.49,27.86 17.49,25.73 IC3.7 | v25.89,23.03 26,22.92 26,21.77 25.33,21.1 | v23.2,20 24.78,20 U$1.P$B1 25.35,21.08 25.33,21.1 | 17.49,27.86 16.7,27.07 v16.7,26.97 | 25.33,21.1 C14.1
  Route15 0.3: 26.5,24.7 25.9,24.1 v25.9,23.04 v25.89,23.03 | 26.5,24.7 27.3,25.5 30.5,25.5 33.3,22.7 v33.3,22.22 | v31.16,8.8 31.95,9.58 39.52,9.58 v41.3,7.8 | 25.85,14 25.85,13.65 26.3,13.2 29.9,13.2 v30.3,12.8 | 25.85,14 U$1.P$Y2 | 18.3,26.3 18.3,23.83 18.15,23.67 18.15,22.05 v17.8,21.7 | 25.85,14 25.1,14.75 25.1,17.8 23.38,19.52 23.38,19.54 23.2,19.72 v23.2,20 | v16.7,26.97 17.63,26.97 18.3,26.3 | 18.3,26.3 18.4,26.3 20,24.7 26.5,24.7
  other vias: 25.85,14.68
3V3/1.7D
  Top 0.15: IC4.C2 19.34,19.34 C34.2
ALERT  (via drill 0.35)
  Top 0.15: v33.3,16.6 32.68,16.6 U$1.P$J24 | U3.5 16.68,19.4 v17.85,20.57
  Bottom 0.15: v33.3,16.6 33.7,16.6 34.1,17 34.1,28.7 31.68,31.12 14.82,31.12 11.92,28.22 11.92,26.18 13.92,24.18 13.92,21.88 15.2,20.6 16.5,20.6 16.6,20.5 17.78,20.5 v17.85,20.57
D+
  Top 0.15: D3.4 27.48,10.82 27.48,12.79 U$1.P$AD6
D-
  Top 0.15: U$1.P$AD4 26.35,13.15 26,12.8 26,12.4 26.2,12.2 26.2,11.77 26.1,11.67 26.1,10.99 D3.6
DN  (via drill 0.35)
  Top 0.15: v23,27 23,27.5 22.8,27.7 | 22.8,27.7 22.7,27.8 22.7,28.93 J4.A7 | J4.B7 23.75,28.05 24.5,27.3 24.5,26.7 24.2,26.4 22.7,26.4 22.4,26.7 22.4,27.3 22.8,27.7 | v22.3,8.3 22.73,8.3 23.01,8.58 25.33,8.58 D3.1
  Bottom 0.15: v22.3,8.3 22.3,8.4 22.74,8.84 22.74,16.93 22.92,17.11 22.92,17.86 22,18.79 22,23.7 22.44,23.7 22.74,24 22.74,26.74 v23,27
DP  (via drill 0.35)
  Top 0.15: D3.3 27.68,7.38 27.3,7 25,7 23.87,8.13 v23.2,8.13 | v23.9,27.1 23.25,27.75 J4.A6 23.25,29.95 23.1,30.1 22.5,30.1 22.25,29.85 J4.B6
  Bottom 0.15: v23.9,27.1 23.9,25.2 23.02,24.32 23.02,23.6 22.27,22.86 22.27,18.9 23.2,17.98 23.2,17 23.05,16.85 23.05,8.28 v23.2,8.13
EPD_3V3  (via drill 0.35)
  Top 0.15: L5.2 30.8,6.06 Q1.3 32.8,6.38 | v9.4,26.1 9.4,16.6 9.8,16.2 10.57,16.2 J2.15 | J2.15 10.94,15.94 EPD_C5.2 | J2.15 J2.16 | v33.19,6 32.8,6.38 | 32.8,6.38 32.8,7.28 C1-EP-DR.1
  Bottom 0.15: v9.4,26.1 9.4,27.79 13.88,32.28 31.58,32.28 32.3,33 34.7,33 39.1,28.6 39.1,20.4 39.5,20 45.2,20 45.3,19.9 45.3,9.3 43.2,7.2 34.4,7.2 33.2,6 v33.19,6
EPD_BUSY  (via drill 0.35)
  Top 0.15: U$1.P$AD12 28.62,13.16 28.62,13.13 29.37,12.38 v29.37,11.9 | v14,19.7 13.4,19.1 10.77,19.1 J2.9
  Bottom 0.15: v14,19.7 14,19.3 13.71,19.01 13.71,18.7 13.68,18.68 13.68,18.32 13.71,18.3 13.71,18.29 14.15,17.85 14.15,9.05 15.4,7.8 20.5,7.8 22.5,5.8 28.7,5.8 29.58,6.68 29.58,11.69 v29.37,11.9
EPD_CS  (via drill 0.15, 0.35)
  Top 0.15: J2.12 10.77,17.9 11.06,17.9 14.29,17.9 14.29,14.24 14.89,13.64 16.62,13.64 v17.43,14.45 | v24.26,17.29 23.59,17.29 23.05,16.75 22.33,16.75 21.07,18 v21.07,18.02
  Bottom 0.15: U$1.P$K2 | U$1.P$K2 24.86,17.18 24.76,17.29 v24.26,17.29 | v17.43,14.45 18.13,15.14 20.85,17 20.85,17.8 v21.07,18.02
  other vias: 25.85,17.18
EPD_DC  (via drill 0.35)
  Top 0.15: J2.11 13.11,18.25 13.95,18.25 v14.26,18.56 | U$1.P$AD10 27.85,13.32 28.04,13.13 28.04,12.98 v28.61,12.41
  Bottom 0.15: v28.61,12.41 28.61,11.69 29.2,11.1 29.2,7.3 28,6.1 22.6,6.1 20.6,8.1 15.8,8.1 14.6,9.3 14.6,17.8 14.26,18.14 v14.26,18.56
EPD_RST  (via drill 0.15, 0.35)
  Top 0.15: v14.9,19.8 14.3,19.2 13.9,19.2 13.4,18.7 10.68,18.7 J2.10
  Bottom 0.15: U$1.P$AC11 28.1,6.8 27.8,6.5 22.7,6.5 20.6,8.6 16,8.6 14.9,9.7 v14.9,19.8
  other vias: 28.1,13.93
GDR  (via drill 0.35)
  Top 0.15: R2_EP_DR.2 16.62,5.84 Q3.1 16.4,6.33 v16.4,7.3 | J2.2 10.91,22.75 12.26,24.09 v12.79,24.09
  Bottom 0.15: v16.4,7.3 15.51,7.3 13.78,9.03 13.78,16.62 13,17.4 13,23.89 v12.79,24.09
GND  (via drill 0.35)
  Top 0.15: IC2.C1 IC2.B1
  Top 0.3: X1.2 35.96,20.79 35.96,20.64 35.26,19.94 X1.4 | TP_BAT_GND.TP 44.34,21.44 40.8,17.9 40.8,15.62 J1.5 J1.3 | IC2.C3 IC2.C2 IC2.C1 | C8.2 33.81,10.29 C7.2 | C16.2 28.25,22.48 28.56,22.16 28.56,22.12 C15.2 29.45,22.17 29.62,22.17 29.78,22.34 29.78,22.38 C10.2 | U$1.P$B7 27.1,18.78 U$1.P$75 | J4.A12_B1 19.23,29.55 J4.SH4 | U$1.P$84 U$1.P$83 | U$1.P$84 U$1.P$74 U$1.P$87 | U$1.P$84 U$1.P$88 | U$1.P$F23 30.7,18.18 U$1.P$78 | IC4.B1 19.23,20.44 19.16,20.44 18.93,20.67 18.93,22.55 19.56,23.18 19.56,23.31 C32.1 19.9,23.36 19.9,23.22 20.1,23.02 v20.1,22.8 | U3.6 16.18,17.96 U3.9 16.24,17.4 16.5,17.4 16.68,17.22 U3.4 | C21.2 15.78,10.72 15.82,10.72 16.4,11.3 C24.1 | EPD_C6.1 13.89,14.03 EPD_C7.1 | IC4.B3 20.74,20.34 v21.2,20.8 | IC1.D2 18.36,15.92 C27.1
  Bottom 0.3: v21.2,20.8 21.2,21.7 v20.1,22.8
  other vias: 33.1,21.1 34.6,11.2 34.26,16.24 31.3,23.56 22.83,19.11 34.5,8.9 13.2,5.1 35.5,5 15.7,5.3 16.3,27.84 21.2,20 31.12,21.58 22,27.7 39,3.4
  pour Top: 47.62,26.08 47.62,26.07 47.62,37.52 47.64,37.54 50.38,40.28 -9.36,40.28 -9.36,-1.79 50.48,-1.79 47.83,22.52 40.78,22.52 40.76,22.54 40.54,22.76 40.52,22.78 40.52,26.02 40.54,26.04 40.56,26.06 40.58,26.08
  pour Bottom: 48.82,26.28 48.82,26.27 48.82,39.03 48.84,39.05 53.35,43.56 -12.97,43.56 -12.97,-3.1 53.44,-3.1 49.04,22.62 40.83,22.62 40.64,22.44 40.62,22.42 40.58,22.42 40.56,22.44 40.54,22.46 40.52,22.48 40.52,26.22 40.54,26.24 40.56,26.26 40.58,26.28
HAPTIC_EN  (via drill 0.35)
  Top 0.15: U$1.P$U1 25.35,15.5 25.05,15.8 25.05,16 24.66,16.4 23.62,16.4 23.02,15.8 v21.98,15.8 | IC4.A1 19.33,21.19 v20.98,22.84
  Bottom 0.15: v21.98,15.8 21.98,16.9 21.77,17.11 21.77,17.49 22.14,17.86 22.14,18.09 21.65,18.58 21.65,21.75 20.98,22.41 v20.98,22.84
IMU_INT1  (via drill 0.35)
  Top 0.15: U$1.P$N1 24.98,16.8 23.5,16.8 23.1,16.4 21.63,16.4 v21.33,16.7 | IC3.5 17.79,24.41 18.8,23.4 v19.03,23.4
  Bottom 0.15: v19.03,23.4 19,23.37 19,23.2 20.6,21.6 20.6,19.2 20.7,19.1 20.74,19.1 21.86,17.98 21.33,17.45 v21.33,16.7
IMU_INT2  (via drill 0.15, 0.35)
  Top 0.15: IC3.6 18.42,24.91 18.92,24.41 19.34,24.41 v19.64,24.11
  Bottom 0.15: U$1.P$P2 25.57,15.9 25,15.9 24.61,15.51 24.26,15.51 23.99,15.25 23.99,10.71 24.1,10.6 24.1,7.9 23.8,7.6 22.1,7.6 20.4,9.3 20.4,9.4 20.3,9.5 16.3,9.5 15.53,10.27 15.53,19.93 15.82,20.22 16.88,20.22 17.3,19.8 17.8,19.8 18.45,20.45 18.45,23.69 18.87,24.11 v19.64,24.11
  other vias: 25.85,16.18
LX1  (via drill 0.35)
  Top 0.15: IC2.B2 IC2.B3 19.55,12.84 20.1,13.39 v20.1,13.54 | L7.1 17.39,9.75 v17.39,10.08
  Bottom 0.15: v20.1,13.54 18.3,13.54 18.3,10.98 v17.39,10.08
LX2  (via drill 0.35)
  Top 0.15: IC2.D2 IC2.D3 20.35,12.89 v21,13.54 | v22.16,9.2 21.17,8.21 L7.2
  Bottom 0.15: v21,13.54 21.65,12.9 21.65,11.71 22.21,11.15 22.21,9.26 v22.16,9.2
MOSI  (via drill 0.15, 0.35)
  Top 0.15: J2.14 10.77,16.9 12.36,16.9 v12.6,16.66 | v35.8,22.8 31.53,22.8 30.7,21.97 30.58,21.97 29.48,20.87 28.87,20.87 v28.6,20.6
  Bottom 0.15: v12.6,16.66 10.26,16.66 9.6,17.32 9.6,25.4 10.3,26.1 10.3,28.2 14.1,32 34.1,32 35.8,30.3 v35.8,22.8 | U$1.P$B13 v28.6,20.6
  other vias: 28.6,19.43
N$1
  Top 0.15: L2.2 26.87,23.54 L3.1
N$2
  Top 0.15: U$1.P$B3 26.1,20.58 26.87,21.35 L2.1
N$3
  Top 0.15: IC1.D1 19.3,16.57 18.67,17.2 18.09,17.2 R9.2
N$4
  Top 0.15: R3.1 15.21,23.41 IC3.1
N$5
  Top 0.15: IC2.D1 20.35,10.45 20.7,10.1 22.47,10.1 23.05,9.52 R4.2
N$6
  Top 0.15: U$1.P$B5 26.6,19.5 27,19.9 27,20.59 27.98,21.57 C15.1 27.88,21.8 27.88,22.62 C16.1 27.73,23.4 L3.2 28.22,23.78 C10.1 29.2,23.3 29.91,24.01 35.23,24.01 38.3,20.94 38.3,18.9 37.1,17.7 36.1,17.7 36,17.7 32.58,17.7 U$1.P$E24
N$7
  Top 0.15: IC2.E1 21.68,11.02 21.9,10.8 22.27,10.8 R2.2
N$8
  Top 0.15: U$1.P$A18 29.85,20.05 C13.1
N$9
  Top 0.15: U$1.P$D23 31.48,18.68 31.8,19 32.2,19 C11.1
N$10
  Top 0.15: U$1.P$A23 32.76,19.93 C2.1 33.15,20.33 33.15,20.46 33.93,21.23 X1.3
N$11
  Top 0.15: U$1.P$B24 32.66,19.43 C1.1 33.1,18.99 33.1,18.86 33.29,18.68 33.67,18.68 33.75,18.6 36.1,18.6 36.41,18.91 X1.1
N$12
  Top 0.15: U$1.P$H23 31.48,17.68 31.8,18 32.5,17.3 37.2,17.3 38.74,18.84 38.74,21.94 39.2,22.39 C3.1 39.2,24.26 39.59,23.86 L1.1
N$14
  Top 0.15: C4.1 41.27,26.82 C22.1 40.46,25.35 L1.2 41.31,24.86 ANT1.1
N$16
  Top 0.15: C9.1 32.54,15.74 U$1.P$N24
N$17  (via drill 0.15, 0.35)
  Top 0.15: C20.1 24.77,12.23 v24.95,12.41
  Bottom 0.15: U$1.P$AC5 26.47,13.8 26.34,13.8 v24.95,12.41
  other vias: 26.6,13.93
N$18
  Top 0.15: C5.1 24.77,18.93 U$1.P$C1
N$22
  Top 0.15: U$1.P$D2 25.8,18.73 25.8,19.55 25.8,19.56 25.8,20.67 26.35,21.23 26.35,23.39 26.3,23.44 26.3,23.5 26.19,23.61 X2.2 25.63,25.75 25.63,25.89 C17.2
N$24
  Top 0.15: C18.2 24.73,18.18 | 24.73,18.18 24.76,18.14 23.05,18.14 22.17,19.02 22.17,19.79 X2.1 | 24.73,18.18 25.17,18.18 25.23,18.23 25.48,18.23 25.53,18.18 U$1.P$F2
N$35
  Top 0.15: J2.5 10.77,21.1 12.42,21.1 EPD_C1.2
N$37  (via drill 0.35)
  Top 0.15: D5.2 8.34,4.9 v8.4,4.9 | v11.1,6 12.84,6 C2-EP-DR.2 | v20.4,5.2 19.9,5.7 19.23,5.7 Q3.3 | v25.3,5 26.23,4.07 L5.1
  Bottom 0.15: v8.4,4.9 9.5,6 9.6,6 | 9.6,6 v11.1,6 | 9.6,6 10.4,6.8 20.3,6.8 20.9,6.2 | v20.4,5.2 21.3,5.2 | 21.3,5.2 21.9,5.2 | 20.9,6.2 21.4,5.7 22.21,5.7 22.39,5.52 24.78,5.52 v25.3,5 | 21.3,5.2 20.9,5.6 20.9,6.2
N$38
  Top 0.15: J2.4 10.68,21.8 12.56,21.8 EPD_C2.2
N$39
  Top 0.15: C32.2 20.52,23.3 21.17,23.3 21.44,23.03 21.44,22.45 IC4.A2
N$40  (via drill 0.35)
  Top 0.15: D4.2 15.7,3.21 14.69,4.21 14.69,5.8 C2-EP-DR.1 14.36,4.87 v14.34,4.85 | D2.1 9.7,3.94 v9.7,4.5
  Bottom 0.15: v14.34,4.85 14.34,4.65 14.5,4.49 14.5,3.6 14.3,3.4 12.7,3.4 12.65,3.35 10,3.35 9.7,3.65 v9.7,4.5
N$43
  Top 0.15: J4.B5 21.35,28.88 R2_USB.1
N$44
  Top 0.15: R1_USB.2 24.25,28.41 J4.A5
N$46
  Top 0.15: R_TYPE_SEL.2 R1_EP_DR.1 6.48,30.42 SJ1.2
N$51
  Top 0.15: J2.18 12.17,14.75 EPD_C6.2
N$55
  Top 0.15: J2.19 11.66,14.25 EPD_C7.2
N$57
  Top 0.15: J2.20 10.77,13.6 11.06,13.6 11.45,13.21 11.45,13.07 EPD_C8.2
N$61
  Top 0.15: J2.22 10.77,12.6 11.06,12.6 11.92,11.74 11.92,11.27 11.93,11.27 11.93,10.51 12.75,9.68 EPD_C10.2
N$65
  Top 0.15: J2.24 10.62,10.34 EPD_C12.2
OUT+
  Top 0.15: TP1.TP 19.82,25.62 20.59,24.85 20.59,24.27 21.71,23.15 21.71,22.22 IC4.A3
OUT-
  Top 0.15: IC4.C3 20.77,19.4 21.24,19.4 21.99,20.15 21.99,23.26 21.79,23.46 TP2.TP
P0.13
  Top 0.15: SW_UP.2 11.1,4.47 11.1,4.75 11.32,4.97 C30.2 | C30.2 11.73,5.13 | C30.2 11.03,4.97 10.2,5.8 10.2,6.49 10.44,6.73 14.87,6.73 14.99,6.61 14.99,5.62 14.97,5.6 14.97,4.8 15.55,4.22 17.37,4.22 18.13,4.98 18.13,5.66 18.88,6.41 21.75,6.41 22.82,7.47 24.13,7.47 25.09,6.52 27.73,6.52 28.4,7.19 28.4,11.1 | R1.1 28.65,10.89 28.42,11.12 28.4,11.1 | 27.35,13.33 U$1.P$AD8 27.76,13.02 27.76,11.73 28.39,11.09 28.4,11.1
P0.14  (via drill 0.15, 0.35)
  Top 0.15: R5.1 35.47,6.43 v35.4,6.5 | v20.4,4.3 20.88,3.82 SW_ENT.2 21.9,4.12 21.9,6.1 22.81,7.01 v23.19,7.01 23.19,6.01 22.2,5.01 C31.2
  Bottom 0.15: U$1.P$AC9 27.2,13.53 27.2,7.1 27.11,7.01 v23.19,7.01 | v35.4,6.5 32.25,3.35 21.35,3.35 v20.4,4.3
  other vias: 27.6,13.93
P1.01
  Top 0.15: U$1.P$Y23 31.55,14.48 31.55,13.8 31.75,13.6 32.12,13.6 33.76,11.96 34.66,11.96 35.05,11.56 35.05,11.01 34.9,10.86 34.9,10.65 32.73,8.48 Q1.1 32.07,9.02 31.48,9.61 R_PWR_EPD.1
P1.02  (via drill 0.35)
  Top 0.15: v35.4,10.5 35.4,7.48 33.81,5.9 R6.1 33.88,5.54 C29.2 33.35,5 32.6,4.25 SW_DN.2 | v34.7,15.2 33.46,15.2 33.35,15.09 32.01,15.09 U$1.P$W24
  Bottom 0.15: v34.7,15.2 35.6,14.3 35.6,10.7 v35.4,10.5
PMIC_INT  (via drill 0.15, 0.35)
  Top 0.15: v24.45,15.06 24.45,15.04 24.2,14.8 22.3,14.8 22.03,15.07 21.68,15.07 21.25,15.49 21.25,15.67 20.6,16.32 IC1.A1
  Bottom 0.15: U$1.P$T2 25.74,15.68 25.12,15.06 v24.45,15.06
  other vias: 25.85,15.68
PREVGH
  Top 0.15: EPD_C9.2 12.75,10.83 12.2,11.39 12.2,11.85 11.18,12.88 11.18,12.98 11.06,13.1 10.77,13.1 J2.21 10.48,13.1 10.19,13.1 10.07,12.98 10.07,12.12 7.48,9.53 7.4,9.53 7.37,9.53 5.9,9.53 5.84,9.47 5.81,9.47 D5.1
PREVGL
  Top 0.15: J2.23 10.77,12.1 11.06,12.1 11.64,11.52 11.64,11.16 11.65,11.15 EPD_C11.2 12.8,7.87 12.8,7.6 12.3,7.1 9.7,7.1 9.3,6.7 | D2.2 4.96,6.76 5.9,7.7 7.6,7.7 8.6,6.7 9.3,6.7 | 9.3,6.7 9.33,6.7
RESE  (via drill 0.35)
  Top 0.15: Q3.2 15.63,4.67 15.25,5.05 15.25,5.49 15.27,5.51 15.27,6.73 14.99,7.01 14.79,7.01 v14.2,7.6 | v12.5,23.1 11.65,22.25 J2.3 10.25,22.25 10,22.5 10,23.7 10.61,24.31 R1_EP_DR.2
  Bottom 0.15: v14.2,7.6 13.5,8.3 13.5,16.5 12.6,17.4 12.6,23 v12.5,23.1
RESET  (via drill 0.15, 0.35)
  Top 0.15: J1.6 39.83,14.97 38.7,16.1 38.7,17 | 38.7,17 38.7,18.4 TP_RESET.TP | v35.3,16.6 35.6,16.3 38,16.3 38.7,17
  Bottom 0.15: U$1.P$AC13 32.63,13.93 v35.3,16.6
  other vias: 28.6,13.93
SCK  (via drill 0.35)
  Top 0.15: U$1.P$A12 27.7,20.58 28.27,21.15 29.36,21.15 30.46,22.25 30.58,22.25 31.41,23.08 34.7,23.08 v35,23.38 | J2.13 10.77,17.4 11.06,17.4 v13.68,17.4
  Bottom 0.15: v35,23.38 35,29.7 33.02,31.68 14.38,31.68 11.5,28.8 11.5,26.21 13.4,24.31 13.4,17.68 v13.68,17.4
SCL  (via drill 0.15, 0.35)
  Top 0.15: v23.5,11.7 23.5,10.52 R4.1 | IC1.B1 20.1,16.5 20.32,16.72 20.6,16.72 | U3.7 15.68,18.98 15.99,19.29 16.17,19.29 16.74,19.86 | TP_SCL.TP 10.31,28.87 R17.2 | TP_SCL.TP 14.77,24.41 IC3.12 | v23.77,15.84 23.77,15.57 23.54,15.34 21.79,15.34 21.53,15.61 21.53,15.79 20.6,16.72 | 16.74,19.86 17.15,20.27 17.15,20.51 17.76,21.12 17.98,21.12 19.24,19.87 19.3,19.87 | 16.74,19.86 16.74,20.84 v17,21.1 | v13.7,29.3 12.14,27.74 TP_SCL.TP | 19.3,19.87 IC4.C1 | 20.6,16.72 20.4,16.92 v20.4,17.3 | 19.3,19.87 19.3,19.8 18.41,18.91 v17.7,18.91
  Bottom 0.15: v23.5,11.7 23.45,11.7 23.45,15.52 v23.77,15.84 24.61,16.68 U$1.P$M2 | v17,21.1 15.9,21.1 14.2,22.8 14.2,24.5 12.2,26.5 12.2,27.8 v13.7,29.3 | v17.7,18.91 17.7,18.8 17.1,18.2 17.1,17.5 17.3,17.3 19.4,17.3 19.6,17.5 20.2,17.5 v20.4,17.3
  other vias: 25.85,16.68
SDA  (via drill 0.15, 0.35)
  Top 0.15: 20.2,18.1 v20.2,18.2 | IC1.C1 19.7,17.5 20.1,17.9 20.1,18 20.2,18.1 | U3.8 15.34,18.86 15.34,19.14 15.8,19.6 15.8,20.1 | 25.26,16.93 U$1.P$L1 24.41,17.87 23.47,17.87 23.2,17.6 | 15.8,20.1 15.8,22.1 15.85,22.15 | R18.2 15.47,28.98 TP_SDA.TP 14.14,27.74 13.3,26.9 13.3,26.8 v13.9,26.2 | R2.1 22.4,11.21 22.4,11.83 v22.13,12.1 | 15.85,22.15 v16.3,21.7 | IC3.2 16.04,23.74 16.04,23.63 15.6,23.18 15.6,22.4 15.85,22.15 | v15.98,19.74 15.98,19.92 15.8,20.1 | 23.2,17.6 22.9,17.3 v22.47,17.3 | 20.2,18.1 20.68,18.58 21.96,18.58 22.94,17.6 23.2,17.6
  Bottom 0.15: v20.2,18.2 20.2,19 19.83,19.37 IC4.B2 19.23,20.34 18.39,19.5 16.22,19.5 v15.98,19.74 | v16.3,21.7 17.9,23.3 17.9,26.1 17.7,26.3 14,26.3 v13.9,26.2 | v22.47,17.3 22.43,17.27 22.43,12.28 22.13,11.97 v22.13,12.1
  other vias: 19.83,20.34
SWDCLK
  Top 0.15: 33.93,14.63 32.05,14.63 U$1.P$AA24 | J1.4 39.19,12.7 37.6,12.7 35.67,14.63 34,14.63 33.93,14.63 | TP_SWDCLK.TP 33.46,13.44 33.1,13.8 33.93,14.63
SWDIO
  Top 0.15: J1.2 40.19,11.66 40.01,11.49 40.01,10.21 39.4,9.6 38.8,9.6 | 38.8,9.6 37.63,9.6 34.99,12.24 33.87,12.24 32.18,13.93 U$1.P$AC24 | TP_SWDIO.TP 38.2,8.53 38.2,9 38.8,9.6
SWO
  Top 0.15: U$1.P$AD22 30.85,11.99 TP_SWO.TP
VBAT
  Top 0.15: 19.7,15.6 IC1.C2 | C37.2 17.41,15.5
  Top 0.3: 17.95,15.1 17.2,15.1 16.8,15.5 | 17.95,15.1 19.2,15.1 19.7,15.6 | 16.8,15.5 16.17,16.13 16.17,16.71 U3.3 U3.2 15.59,16.64 15.59,16.25 15.49,16.15 TP_VBAT.TP | C27.2 17.95,15.1 | 17.41,15.5 16.8,15.5
VBUS  (via drill 0.35)
  Top 0.15: C38.2 19.71,27.71
  Top 0.3: C21.1 15.36,12.31 C43.1 15.55,12.54 16.29,13.29 16.77,13.29 16.94,13.46 v17.4,13.46 | U$1.P$AD2 25.77,13.35 25.77,13.09 25.65,12.96 25.65,12.05 v25.74,11.96 | 22.3,14.3 v21.82,14.3 | 22.3,14.3 21.89,14.71 21.53,14.71 20.9,15.35 20.9,15.52 IC1.A2 | v24.58,14.18 24.46,14.3 22.3,14.3 | v26.6,12.5 26.69,12.41 D3.5 | 20.45,27.95 C42.1 19.98,28.1 19.8,28.1 19.8,27.8 19.71,27.71 | 20.45,27.95 20.6,28.09 J4.A9_B4 20.6,29.44 20.98,29.83 21.13,29.83 21.9,30.6 24.3,30.6 25.4,29.5 J4.A4_B9 | v20.76,26.4 20.76,27.06 20.9,27.2 20.9,27.5 20.45,27.95
  Route15 0.3: v17.4,13.46 17.04,13.46 15.3,15.2 15.3,16.6 16.9,18.2 16.9,20.2 16.6,20.5 16,20.5 15.6,20.9 15.6,29 16.1,28.5 17,28.5 19.1,26.4 v20.76,26.4
  Bottom 0.3: v17.4,13.46 18.14,14.2 21.72,14.2 v21.82,14.3 | 25.6,12.1 26,12.5 v26.6,12.5 | v24.58,14.18 24.58,13.19 24.42,13.03 24.42,12.19 24.73,11.88 25.16,11.88 25.38,12.1 25.6,12.1 | v25.74,11.96 25.6,12.1
VREG
  Top 0.15: 20.1,15.2 IC1.B2 | 18.92,10.01 C23.1
  Top 0.3: 18.53,10.4 IC2.A1 IC2.A2 IC2.A3 19.15,14.25 20.1,15.2 | C24.2 16.64,10.2 16.64,9.27 C39.1 | C24.2 15.45,9.21 TP_VREG.TP | 18.53,10.4 17.82,10.4 17.61,10.61 16.85,10.61 C24.2 | 18.53,10.4 18.92,10.01